# EAGLE board stepper_power (EAGLE 7.2.0)
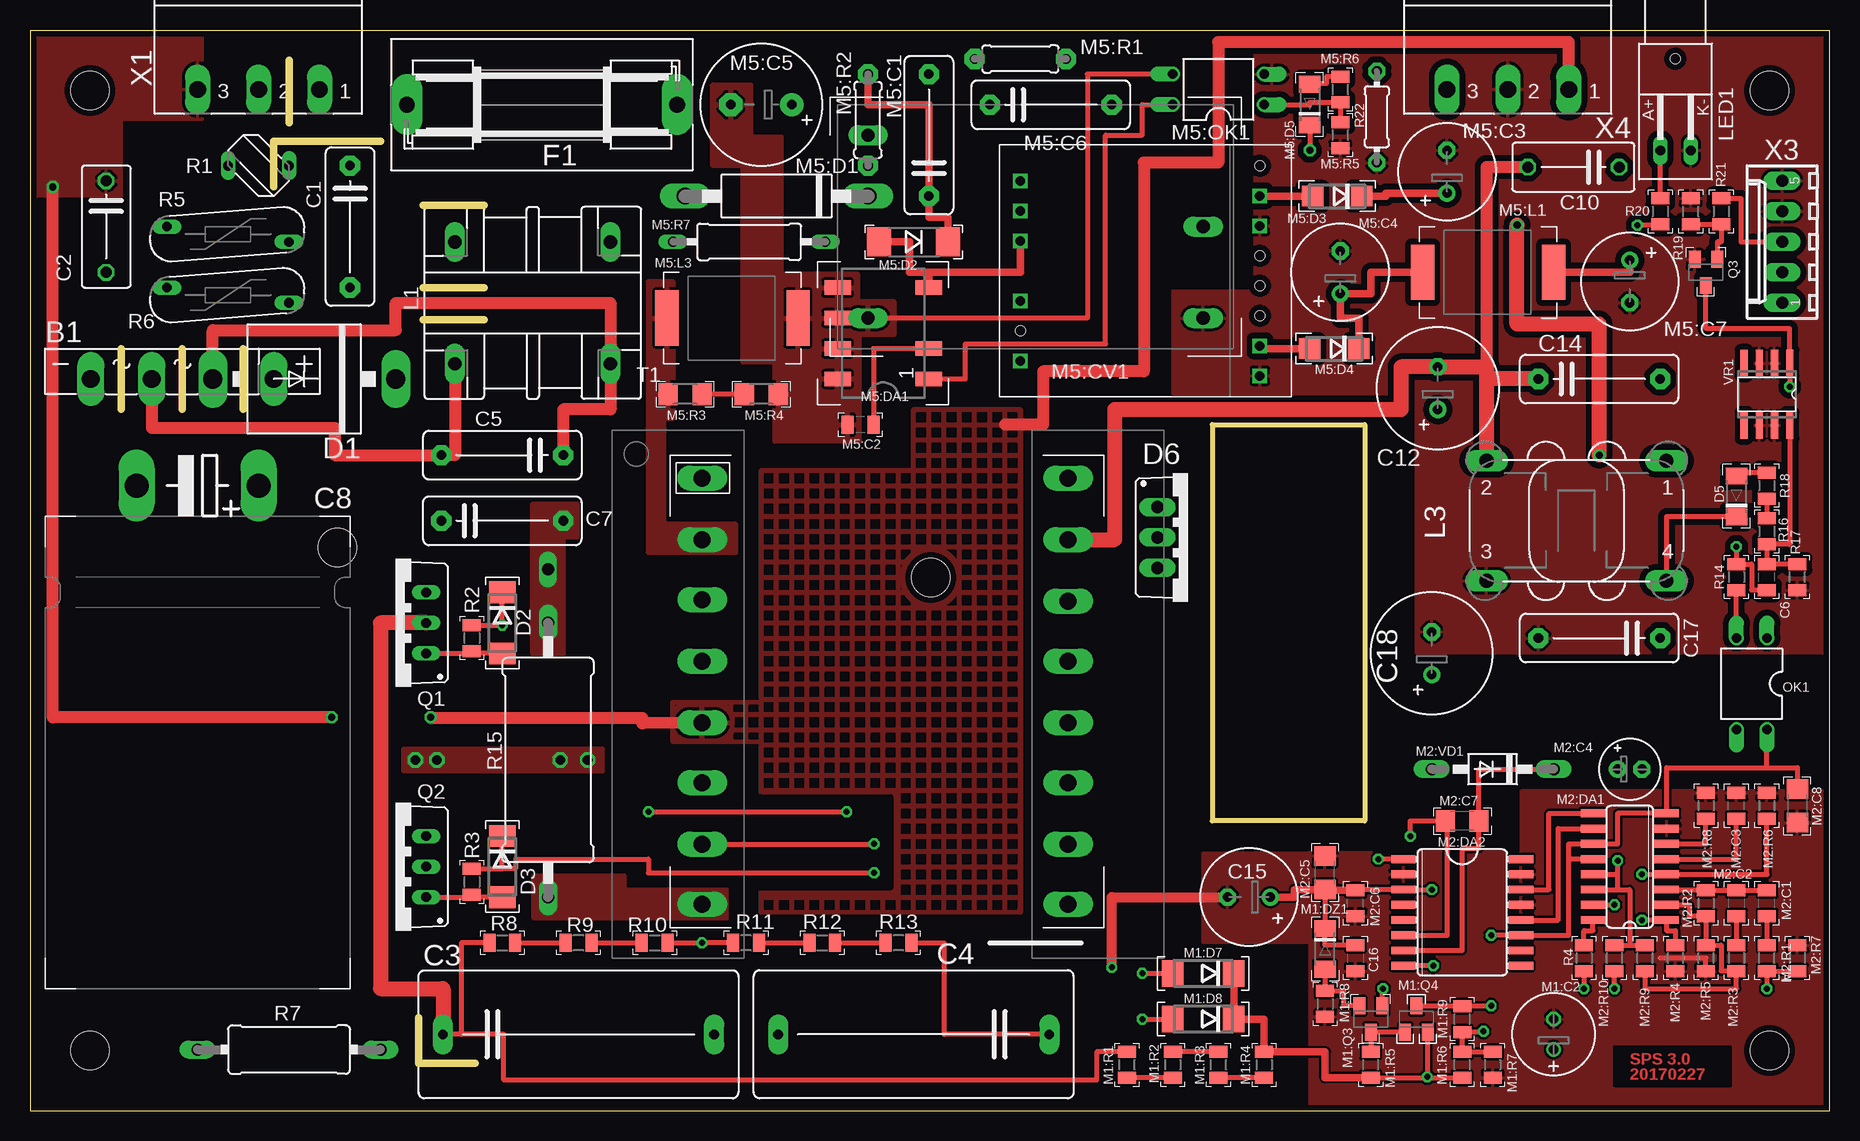
[diagram p0: board, top side]
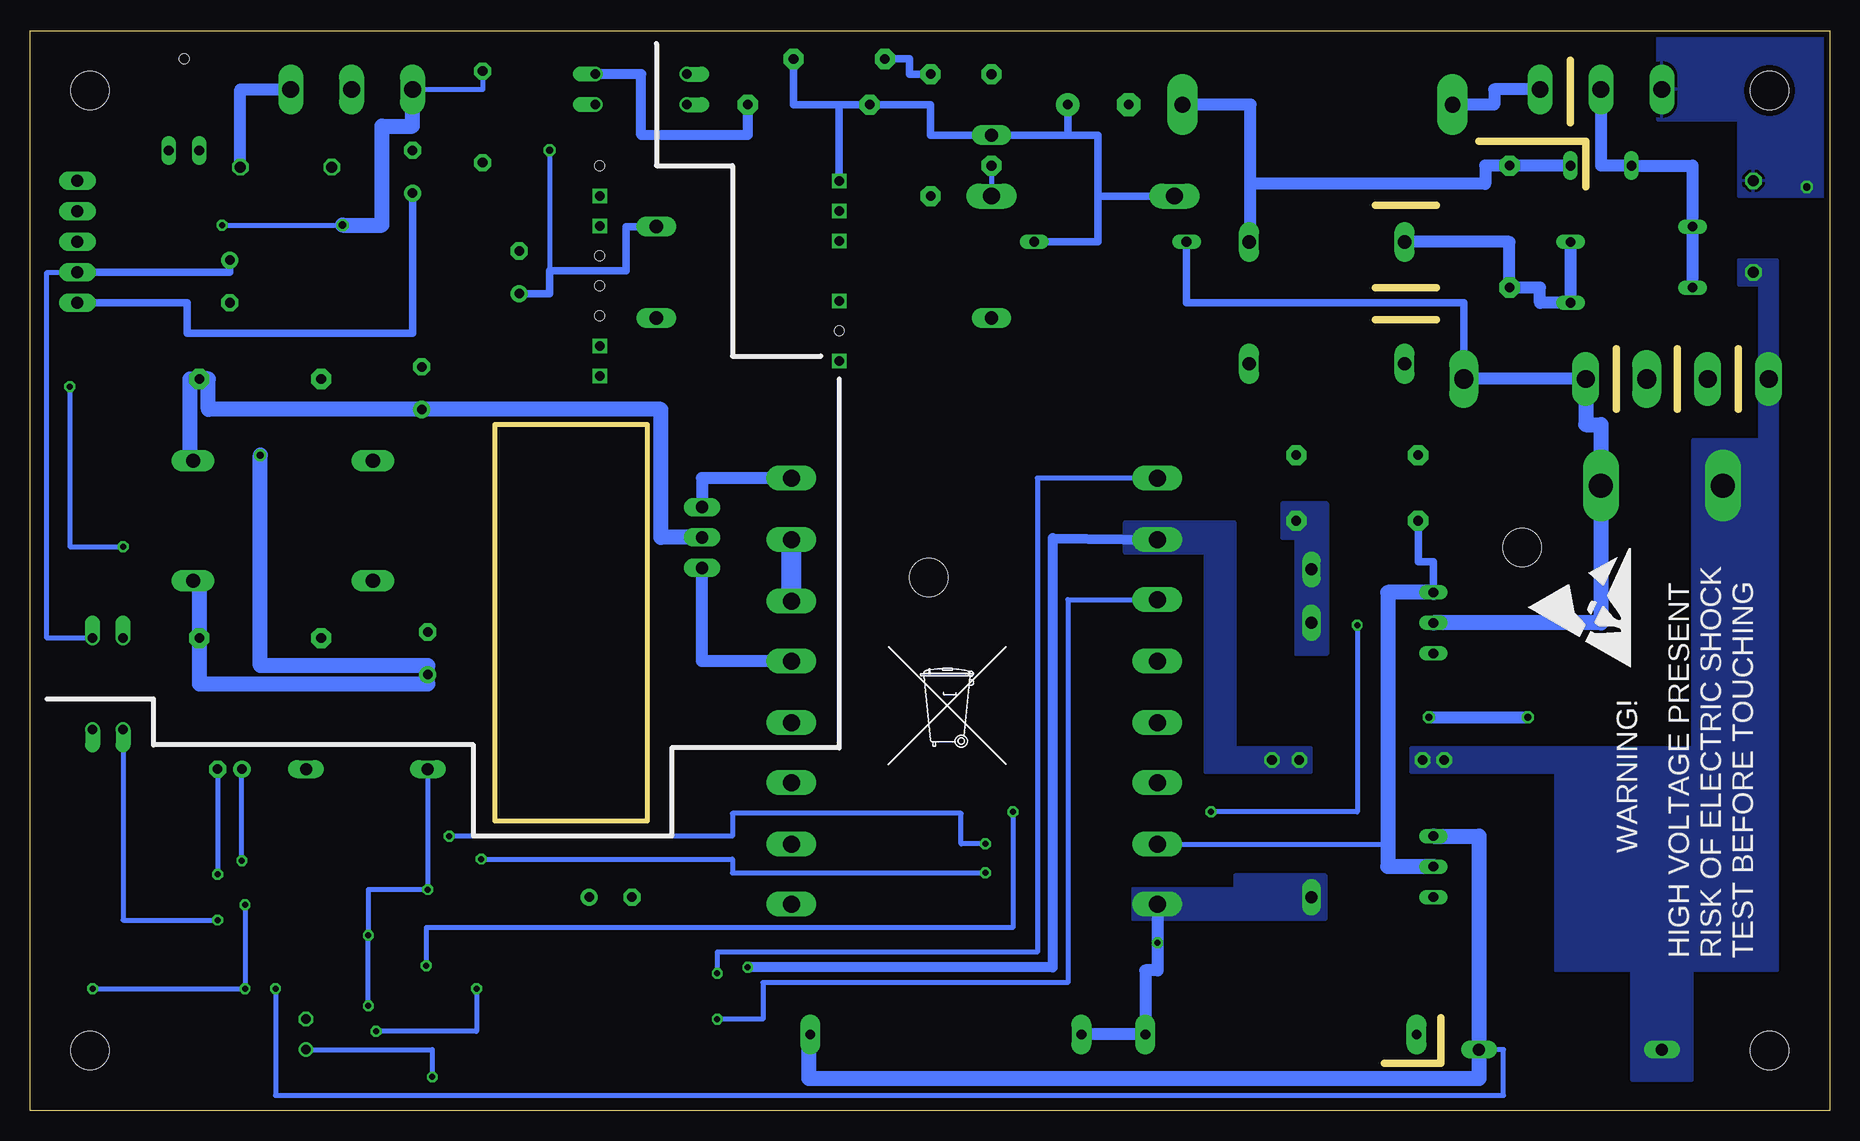
[diagram p1: board, bottom side, seen from below]

Size 150 x 90 mm. Coordinates in mm from the lower left corner, seen from the top.
Outline: 0,0 150,0 150,90 0,90 0,0
Copper layers (1*16): Top 0.035mm / dielectric 1.5mm / Bottom 0.035mm
Design rules "default *": minimum track width 10mil, minimum drill 0.5mm, track to track 8mil, track to pad 8mil, pad to pad 8mil, via to via 8mil, smd to smd 8mil, copper to edge 20mil, drill to drill 8mil, minimum pad ring 0.1mm, minimum via ring 8mil, stop-mask expansion 0.1mm, vias tented up to drill 0.5mm, thermal gap 10mil
Net classes: 0 default: clearance 0.205 mm; 1 power: clearance 0.305 mm to class 0, clearance 0.305 mm; 2 power++: clearance 0.5 mm
Holes 3.2 mm at 5,5 5,85 145,85 145,5 25.62,46.91 75.08,44.42
tRestrict: 7 lines
Milling: 15 lines

## Footprints (pad centres in the part's own frame; a part is rotated, then mirrored left to right if it is on the bottom)
GBU4S = drill 1.499 long: + 7.62,0; - -7.62,0; AC1 2.54,0; AC2 -2.54,0
C102-043X133 = drill 0.8 pad 1.676 octagon: 1 -5.08,0; 2 5.08,0
C075-042X103 = drill 0.914 octagon: 1 -3.81,0; 2 3.81,0
C225-108X268 = drill 0.8 pad 1.676 long: 1 -11.303,0; 2 11.303,0
C0805 = smd 1 x 1.5: 1 -1.077,0; 2 1.077,0
EB25H = drill 2 long: + -5.08,0; - 5.08,0
E3,5-10 = drill 0.8 pad 1.422: + -1.778,0 | drill 0.8 pad 1.422 octagon: - 1.778,0
E3,5-8 = drill 0.8 pad 1.422: + -1.778,0 | drill 0.8 pad 1.422 octagon: - 1.778,0
P6-15-1 = drill 1.6 long: A 7.62,0; C -7.62,0
DO214AA = smd 1.8 x 2.2: A 2.55,0; C -2.55,0
SOD80C = smd 1.4 x 1.8: A 1.7,0; C -1.7,0
TO220ABS = drill 1.016 long: 1 -2.54,-2.54; 2 0,-2.54; 3 2.54,-2.54
SH22,5A = drill 1.321 pad 2.54 long: 1 -11.252,0; 2 11.252,0
MFE = drill 1.118 long: 1 6.477,-5.08; 2 6.477,5.08; 3 -6.477,5.08; 4 -6.477,-5.08
82721K = drill 1.194 long: 1 7.493,5.004; 2 -7.493,5.004; 3 -7.493,-5.004; 4 7.493,-5.004
Q62902-B155 = drill 0.813 long: A 7.62,-1.27; K 7.62,1.27 | hole 0.813: 0,0
E2,5-7 = drill 0.8: + -1.27,0 | drill 0.8 octagon: - 1.27,0
SOT23-BEC = smd 1 x 1.4: B -0.95,-1.1; C 0,1.1; E 0.95,-1.1
R0805 = smd 1 x 1.5: 1 -1.077,0; 2 1.077,0
E2-5 = drill 0.8 pad 1.422: + -1.016,0 | drill 0.8 pad 1.422 octagon: - 1.016,0
C1206 = smd 1.6 x 1.8: 1 -1.4,0; 2 1.4,0
SO16 = smd 0.66 x 2.032: 1 -4.445,-3.073; 2 -3.175,-3.073; 3 -1.905,-3.073; 4 -0.635,-3.073; 5 0.635,-3.073; 6 1.905,-3.073; 7 3.175,-3.073; 8 4.445,-3.073; 9 4.445,3.073; 10 3.175,3.073; 11 1.905,3.073; 12 0.635,3.073; 13 -0.635,3.073; 14 -1.905,3.073; 15 -3.175,3.073; 16 -4.445,3.073
SO16L = smd 0.66 x 2.032: 1 -4.445,-4.902; 2 -3.175,-4.902; 3 -1.905,-4.902; 4 -0.635,-4.902; 5 0.635,-4.902; 6 1.905,-4.902; 7 3.175,-4.902; 8 4.445,-4.902; 9 4.445,4.902; 10 3.175,4.902; 11 1.905,4.902; 12 0.635,4.902; 13 -0.635,4.902; 14 -1.905,4.902; 15 -3.175,4.902; 16 -4.445,4.902
DO41-10 = drill 1 long: A 5.08,0; C -5.08,0
E5-10,5 = drill 0.8 pad 1.93: + -2.54,0 | drill 0.8 pad 1.93 octagon: - 2.54,0
VSK-S1 = drill 1.1 long: AC1 0,15.24; AC2 0,0; COM 27.94,0; VDC 27.94,7.62
CB417-15 = drill 1.397 long: A 7.62,0; C -7.62,0
MELF-MLL41 = smd 2 x 2.4: A 2.879,0; C -2.879,0
DO214AC = smd 1.8 x 1.7: A 2.05,0; C -2.05,0
DIP8_1 = smd 1.2 x 2.2: 1 -3.81,-3.8; 2 -1.27,-3.8; 4 3.81,-3.8; 5 3.81,3.8; 6 1.27,3.8; 7 -1.27,3.8; 8 -3.81,3.8
PLOKSCIAS = smd 1.93 x 4.6: 1 -5.334,0; 2 5.588,0
DIL04 = drill 0.8 pad 1.27 offset: 1 -1.27,-3.81; 2 1.27,-3.81; 3 1.27,3.81; 4 -1.27,3.81
0207/7 = drill 0.813 pad 1.676 octagon: 1 -3.81,0; 2 3.81,0
R1206 = smd 1.6 x 1.803: 1 -1.422,0; 2 1.422,0
0309/12 = drill 0.813 long: 1 -6.35,0; 2 6.35,0
750841630 = drill 0.8 square: 1 0,0; 2 0,-2.5; 3 0,-5; 4 0,-10; 6 0,-15; 7 19.96,-16.25; 8 19.96,-13.75; 12 19.96,-3.75; 13 19.96,-1.25 | hole 0.8: 19.96,-11.25; 19.96,-8.75; 19.96,-6.25; 19.96,1.25; 0,-12.5
LP_D1.0 = drill 1 long: P$1 0,0
TO220BV = drill 0.8 long: D 0,-2.54; G -2.54,-2.54; S 2.54,-2.54
B57164 = drill 0.813 long: 1 -2.54,0; 2 2.54,0
TABLETE_10 = drill 0.8 long: 1 -5.08,0; 2 5.08,-1.27
0411/15 = drill 1 long: 1 -7.62,0; 2 7.62,0
P0817/22 = drill 1.016 long: 1 -11.43,0; 2 11.43,0
0204/7 = drill 0.8 pad 1.422 octagon: 1 -3.81,0; 2 3.81,0
ETD-39-K-H-16P = drill 1.4 pad 1.93 long: 1 6.5,40; 2 6.5,34.873; 3 6.5,29.873; 4 6.5,24.746; 5 6.5,19.619; 6 6.5,14.619; 7 6.5,9.492; 8 6.5,4.492; 9 37,4.492; 10 37,9.492; 11 37,14.619; 12 37,19.619; 13 37,24.746; 14 37,29.746; 15 37,34.873; 16 37,40
SO-08 = smd 0.6 x 2.2: 1 -1.905,-2.6; 2 -0.635,-2.6; 3 0.635,-2.6; 4 1.905,-2.6; 5 1.905,2.6; 6 0.635,2.6; 7 -0.635,2.6; 8 -1.905,2.6
MSTBA3 = drill 1.4 long: 1 -5.08,5.08; 2 0,5.08; 3 5.08,5.08
6410-05 = drill 1.016 long: 1 -5.08,0; 2 -2.54,0; 3 0,0; 4 2.54,0; 5 5.08,0

## Placement (x,y rotation side)
B1  GBU8K  [GBU4S]  12.7,60.96 0 top
C1  10n/400V  [C102-043X133]  26.67,73.66 270 top
C2  10n/400V  [C075-042X103]  6.35,73.66 270 top
C3  1,0uFx400V  [C225-108X268]  45.72,6.35 0 top
C4  1,0uFx400V  [C225-108X268]  73.66,6.35 180 top
C5  10n/400V  [C102-043X133]  39.37,54.61 180 top
C6  0.1  [C0805]  144.78,44.45 90 top
C7  1n  [C102-043X133]  39.37,49.15 0 top
C8  330,0x450V  [EB25H]  13.97,52.07 180 top
C10  10n  [C075-042X103]  128.65,78.61 180 top
C12  470x50V  [E3,5-10]  117.35,60.2 90 top
C14  0.1  [C102-043X133]  130.81,60.96 0 top
C15  220,0x35V  [E3,5-8]  101.6,17.78 180 top
C16  0.1  [C0805]  110.49,12.7 270 top
C17  0.1  [C102-043X133]  130.81,39.37 180 top
C18  470x50V  [E3,5-10]  116.84,38.1 90 top
D1  P600K  [P6-15-1]  22.86,60.96 180 top
D2  UF4007  [DO214AA]  39.37,40.64 270 top
D3  UF4007  [DO214AA]  39.37,20.32 270 top
D5  *  [SOD80C]  142.24,51.18 90 top
D6  MUR1620CTG  [TO220ABS]  96.52,47.75 270 top
F1  5A  [SH22,5A]  42.67,83.82 0 top
L1  MFE  [MFE]  41.91,67.31 0 top
L3  82721K  [82721K]  128.91,49.15 0 top
LED1  POWER  [Q62902-B155]  137.16,87.63 270 top
M1:C2  47,0x50V  [E2,5-7]  127,6.35 90 top
M1:D7  STTH108  [DO214AA]  97.79,11.43 180 top
M1:D8  STTH108  [DO214AA]  97.79,7.62 180 top
M1:DZ1  16V  [SOD80C]  107.95,13.46 270 top
M1:Q3  BC817-16SMD  [SOT23-BEC]  111.76,7.62 180 top
M1:Q4  BC807-16SMD  [SOT23-BEC]  115.57,7.62 0 top
M1:R1  47k  [R0805]  91.44,3.81 90 top
M1:R2  47k  [R0805]  95.25,3.81 270 top
M1:R3  47k  [R0805]  99.06,3.81 90 top
M1:R4  47k  [R0805]  102.87,3.81 270 top
M1:R5  100k  [R0805]  111.76,3.81 90 top
M1:R6  470k  [R0805]  119.38,3.81 90 top
M1:R7  7.5k  [R0805]  121.92,3.81 270 top
M1:R8  1k  [R0805]  107.95,8.89 270 top
M1:R9  100k  [R0805]  119.38,7.62 90 top
M2:C1  10n  [C0805]  144.78,17.27 90 top
M2:C2  10n  [C0805]  142.24,17.27 270 top
M2:C3  4700  [C0805]  142.24,25.4 90 top
M2:C4  10x25V  [E2-5]  133.35,28.45 0 top
M2:C5  1uF  [C1206]  107.95,19.81 90 top
M2:C6  0.1  [C0805]  110.49,17.27 90 top
M2:C7  1uF  [C1206]  119.38,24.13 180 top
M2:C8  1uF  [C1206]  147.32,25.4 270 top
M2:DA1  TL494CD  [SO16]  133.35,20.32 90 top
M2:DA2  IR2113S  [SO16L]  119.38,16.51 270 top
M2:R1  33k  [R0805]  144.78,12.7 90 top
M2:R2  1M  [R0805]  139.7,17.27 270 top
M2:R3  33k  [R0805]  142.24,12.7 270 top
M2:R4  20k  [R0805]  137.16,12.7 90 top
M2:R5  20k  [R0805]  139.7,12.7 90 top
M2:R6  10k  [R0805]  144.78,25.4 270 top
M2:R7  1k*  [R0805]  147.32,12.7 270 top
M2:R8  4.1k  [R0805]  139.7,25.4 270 top
M2:R9  20k  [R0805]  134.62,12.7 90 top
M2:R10  20k  [R0805]  132.08,12.7 90 top
M2:VD1  UF4007  [DO41-10]  121.92,28.45 180 top
M5:C1  0.01x630V  [C102-043X133]  74.93,81.28 90 top
M5:C2  0.1  [C0805]  69.22,57.15 180 top
M5:C3  100x50V  [E3,5-8]  118.11,78.23 90 top
M5:C4  100x16V  [E3,5-8]  109.22,69.85 90 top
M5:C5  10.0x400V  [E5-10,5]  60.96,83.82 180 top
M5:C6  2.2nx250V  [C102-043X133]  85.09,83.82 0 top
M5:C7  100x16V  [E3,5-8]  133.35,69.09 270 top
M5:CV1  VSK-S1-5V  [VSK-S1]  69.85,66.04 0 top
M5:D1  P6KE150  [CB417-15]  62.23,76.2 180 top
M5:D2  LL4007  [MELF-MLL41]  73.66,72.39 180 top
M5:D3  10MQ100  [DO214AC]  108.97,76.2 180 top
M5:D4  10MQ100  [DO214AC]  108.71,63.5 180 top
M5:D5  12V  [SOD80C]  106.68,83.82 90 top
M5:DA1  [DIP8_1]  71.12,64.77 90 top
M5:L1  [PLOKSCIAS]  121.41,69.85 0 top
M5:L3  [PLOKSCIAS]  58.42,66.04 0 top
M5:OK1  PC817  [DIL04]  99.06,85.09 90 top
M5:R1  100  [0207/7]  82.55,87.63 0 top
M5:R2  1k  [0207/7]  69.85,82.55 270 top
M5:R3  1k  [R1206]  54.61,59.69 0 top
M5:R4  1k  [R1206]  60.96,59.69 0 top
M5:R5  1k  [R0805]  109.22,81.28 90 top
M5:R6  470  [R0805]  109.22,85.09 90 top
M5:R7  47  [0309/12]  59.94,72.39 0 top
M5:T2  [750841630]  82.55,77.47 0 top
OK1  PC817  [DIL04]  143.51,35.56 180 top
P1  [LP_D1.0]  43.18,45.09 90 top
Q1  IRF740V  [TO220BV]  30.48,40.64 90 top
Q2  IRF740V  [TO220BV]  30.48,20.32 90 top
Q3  BC817  [SOT23-BEC]  139.7,69.85 180 top
R1  275V  [B57164]  19.05,78.74 180 top
R2  30  [R0805]  36.83,39.37 270 top
R3  30  [R0805]  36.83,19.05 270 top
R4  1k  [R0805]  129.54,12.7 270 top
R5  33  [TABLETE_10]  16.51,72.39 180 top
R6  33  [TABLETE_10]  16.51,67.31 180 top
R7  0.1  [0411/15]  21.59,5.08 0 top
R8  33k  [R0805]  39.37,13.97 0 top
R9  33k  [R0805]  45.72,13.97 180 top
R10  33k  [R0805]  52.07,13.97 0 top
R11  33k  [R0805]  59.69,13.97 180 top
R12  33k  [R0805]  66.04,13.97 0 top
R13  33k  [R0805]  72.39,13.97 180 top
R14  1.2k  [R0805]  142.24,44.45 270 top
R15  100  [P0817/22]  43.18,29.21 90 top
R16  10k  [R0805]  144.78,48.26 270 top
R17  10k  [R0805]  147.32,44.45 90 top
R18  82k  [R0805]  144.78,52.07 270 top
R19  10k  [R0805]  138.43,74.93 90 top
R20  [R0805]  135.89,74.93 270 top
R21  1k  [R0805]  140.97,74.93 270 top
R22  10k  [0204/7]  112.27,82.8 270 top
T1  [ETD-39-K-H-16P]  49.53,12.7 0 top
U$2  [TONNE_10.00]  73.66,31.75 0 bottom
U$3  [ESD_10.00]  16.51,36.83 90 bottom
VR1  TL431  [SO-08]  144.78,59.69 180 top
X1  MAIN  [MSTBA3]  19.05,90.17 180 top
X3  Stepper Control  [6410-05]  146.05,72.39 90 top
X4  MSTBA3  [MSTBA3]  123.19,90.17 180 top

## Library data of the parts
B1 = rectifier
C1-C8 C10 C12 C14-C18 M1:C2 M1:R1-M1:R9 M2:C1-M2:C8 M2:R1-M2:R10 M5:C1-M5:C7 M5:R1-M5:R7 R2-R4 R7-R22 = rcl
D1-D3 D5 D6 M1:D7 M1:D8 M1:DZ1 M2:VD1 M5:D1-M5:D5 = diode
F1 = fuse
L1 L3 M5:L1 M5:L3 = inductors
LED1 = led
M1:Q3 Q3 = transistor-npn
M1:Q4 = transistor-pnp
M2:DA1 M5:DA1 = linear
M2:DA2 = ir
M5:CV1 = descreet
M5:OK1 OK1 = optocoupler
M5:T2 T1 = trafo
P1 = misc
Q1 Q2 = transistor-power
R1 R5 R6 = ptc-ntc
U$2 U$3 = logo
VR1 = v-reg
X1 X4 = con-phoenix-508
X3 = connectors

## Nets
5VDC: M5:C7.+ M5:L1.2 OK1.1 X3.2
12VDC: M5:C3.+ M5:D3.C X3.1
+V [power++]: B1.+ C3.1 C8.+ D1.C M1:R1.2 M5:R7.1 Q1.D R8.1
AGND: B1.- C2.2 C8.- C15.- C16.2 M1:C2.- M1:R7.2 M1:R8.2 M2:C3.2 M2:C5.2 M2:C6.1 M2:C8.2 M2:DA1.7 M2:DA2.2 M2:DA2.13 M2:DA2.15 M2:R4.1 M2:R5.1 M2:R6.1 M2:R7.1 M2:R8.1 M5:L3.1 M5:R3.1 R7.1 T1.2
COM [power++]: C17.2 C18.- L3.3 LED1.K M5:C3.- M5:C4.- M5:C6.2 M5:C7.- M5:CV1.COM M5:OK1.2 M5:R5.1 M5:T2.7 M5:T2.12 Q3.E R17.1 R19.2 R22.2 VR1.2 VR1.3 VR1.6 VR1.7 X3.4 X3.5 X4.2
FB: M2:DA1.16 R4.1
HO [power++]: D2.C M2:DA2.8 R2.1
LO [power]: D3.C M2:DA2.1 R3.1
M1:N$1 [power]: M1:C2.+ M1:D7.C M1:D8.C M1:Q4.E M1:R4.1 M1:R5.1 M1:R6.1
M1:N$2: M1:Q3.B M1:R6.2 M1:R7.1 M1:R9.1
M1:N$3: M1:DZ1.A M1:Q3.E M1:R8.1
M1:N$4: M1:Q3.C M1:Q4.B M1:R5.2
M1:N$5: M1:R3.1 M1:R4.2
M1:N$8: M1:R1.1 M1:R2.2
M1:N$9: M1:R2.1 M1:R3.2
M2:N$1: M2:DA1.9 M2:DA2.14
M2:N$2: M2:DA1.10 M2:DA2.12
M2:N$3 [power++]: M2:C7.1 M2:DA2.7 M2:VD1.C
M2:N$4: M2:DA1.6 M2:R8.2
M2:N$5: M2:C3.1 M2:DA1.5
M2:N$6: M2:C1.1 M2:R1.2
M2:N$7: M2:C1.2 M2:C2.1 M2:DA1.3 M2:R2.1
M2:N$8: M2:DA1.2 M2:R2.2 M2:R3.2 M2:R5.2 M2:R9.1
M2:N$9: M2:C4.+ M2:DA1.13 M2:DA1.14 M2:R9.2 M2:R10.2
M2:N$10: M2:C2.2 M2:R3.1
M2:N$11: M2:DA1.15 M2:R1.1 M2:R7.2 M2:R10.1
M2:N$12: M2:C4.- M2:DA1.4 M2:R6.2
M5:AGND: M5:C2.2 M5:C5.- M5:CV1.AC2 M5:DA1.5 M5:DA1.6 M5:DA1.7 M5:DA1.8 M5:L3.2 M5:OK1.3 M5:R4.2
M5:N$1: M5:C1.2 M5:R1.1
M5:N$2: M5:D1.C M5:R2.2
M5:N$3: M5:C5.+ M5:C6.1 M5:CV1.AC1 M5:D1.A M5:R1.2 M5:R7.2 M5:T2.1
M5:N$4: M5:C1.1 M5:D2.C M5:R2.1
M5:N$5: M5:C2.1 M5:DA1.2
M5:N$6: M5:D2.A M5:DA1.4 M5:T2.3
M5:N$7: M5:C4.+ M5:CV1.VDC M5:D4.C M5:D5.C M5:L1.1
M5:N$8: M5:DA1.1 M5:OK1.4
M5:N$9: M5:D3.A M5:T2.13
M5:N$10: M5:D4.A M5:T2.8
M5:N$13: M5:OK1.1 M5:R5.2 M5:R6.1
M5:N$15: M5:R3.2 M5:R4.1
M5:N$16: M5:D5.A M5:R6.2
N$1: OK1.2 R14.2
N$2: R11.1 R12.1
N$4 [power++]: C3.2 C4.2 R10.2 R11.2 R15.1 T1.8
N$5: C7.2 P1.P$1 R15.2
N$6: D3.A Q2.G R3.2
N$7: D6.1 T1.16
N$8: D6.3 T1.13
N$9: C6.2 R16.2 R17.2 VR1.8
N$10 [power++]: D5.A R18.1
N$12: C10.2 C12.- C14.1 L3.2 T1.14 T1.15
N$13: Q3.B R19.1 R21.2
N$14 [power++]: C12.+ C14.2 D6.2 L3.1
N$16: D2.A Q1.G R2.2
N$19: R12.2 R13.2
N$26: R9.1 R10.1
N$27: R8.2 R9.2
N$28: LED1.A R20.1
N$29 [power++]: C1.2 L1.3 R5.1 R6.1
N$30 [power++]: C1.1 F1.2 L1.2 R1.1
N$31 [power++]: R1.2 R5.2 R6.2 X1.2
N$32 [power++]: F1.1 X1.1
N$33: C6.1 Q3.C R14.1 VR1.1
N$34: B1.AC2 C5.2 L1.4
N$36: R16.1 R18.2
N$37 [power]: C4.1 Q2.S R4.2 R7.2 R13.1
N$43 [power++]: B1.AC1 C5.1 D1.A L1.1
OKE [power]: M2:DA1.1 M2:R4.2 OK1.3
PE [power++]: C2.1 C10.1 T1.5 X1.3 X4.1
PSTOP: R21.1 X3.3
TRA [power]: M1:D8.A T1.3
TRB [power]: M1:D7.A T1.1
VB [power++]: C7.1 M2:C7.2 M2:DA2.6 Q1.S Q2.D T1.7
VC [power]: C15.+ C16.1 M1:DZ1.C M1:Q4.C M1:R9.2 M2:C5.1 M2:C6.2 M2:C8.1 M2:DA1.8 M2:DA1.11 M2:DA1.12 M2:DA2.3 M2:DA2.11 M2:VD1.A OK1.4
VOUT [power++]: C17.1 C18.+ D5.C L3.4 R20.2 R22.1 X4.3

## Tracks (layer width: path | path; a pad name or v marks a point on that pad's centre or on a via)
5VDC
  Top 0.61: M5:L1.2 133.35,69.85 M5:C7.+
  Bottom 0.406: OK1.1 148.59,39.37 148.59,69.85 X3.2
  Bottom 0.61: X3.2 133.35,69.85 M5:C7.+
12VDC
  Top 0.61: M5:D3.C 113.03,76.2 113.03,76.45 M5:C3.+
  Bottom 0.61: M5:C3.+ 118.11,64.77 136.91,64.77 136.91,67.31 X3.1
+V
  Top 0.406: R8.1 35.94,13.97 35.94,6.35 | 35.94,6.35 C3.1 | M1:R1.2 88.9,4.89 88.9,2.54 39.5,2.54 39.5,6.35 35.94,6.35
  Top 1.27: Q1.D 29.21,40.64 29.21,10.16 34.42,10.16 C3.1
  Bottom 0.61: D1.C 30.48,67.31 53.59,67.31 M5:R7.1
  Bottom 1.016: B1.+ D1.C
  Bottom 1.27: B1.+ 20.32,57.15 19.05,57.15 C8.+ 19.05,40.64 Q1.D
AGND  (via drill 0.5, 0.8 pad 1.27)
  Top 0.406: M2:R5.1 139.7,12.7 135.89,12.7
  Top 0.813: v90.17,11.94 90.17,17.78 C15.-
  Bottom 0.813: v90.17,11.94 64.77,11.94 64.77,47.7 T1.2
  other vias: 33.91,29.21 44.2,29.21 32.13,29.21 46.48,29.21
  pour Bottom (no thermals): 4.32,70.87 7.62,70.87 7.62,68.83 5.84,68.83 5.84,55.88 11.43,55.88 11.43,30.23 34.92,30.23 34.92,28.19 22.86,28.19 22.86,11.68 16.51,11.68 16.51,2.54 11.43,2.54 11.43,11.68 4.32,11.68
  pour Top: 97.79,21.46 124.33,21.59 124.33,26.67 149.86,26.67 149.86,0 106.68,0 106.68,13.97 97.79,13.97
  pour Bottom (no thermals): 43.18,30.23 49.53,30.23 49.53,49.02 58.8,49.02 58.8,46.48 52.07,46.48 52.07,28.19 43.18,28.19
  pour Top: 31.11,30.23 47.75,30.23 47.75,28.19 31.11,28.19
  pour Top: 51.56,69.09 53.59,69.09 53.59,57.66 52.83,57.66 52.83,48.9 51.56,48.9
  pour Top (no thermals): 51.56,48.9 58.8,48.9 58.8,46.48 51.56,46.48
COM
  Bottom 0.813: M5:C6.2 90.17,81.28 99.06,81.28 99.06,86.36 M5:OK1.2
  pour Top: 149.86,38.1 115.57,38.1 115.57,59.69 95.25,59.69 95.25,68.33 102.11,68.33 102.11,90.17 149.86,90.17
FB
  Top 0.406: R4.1 129.54,14.99 130.28,14.99 M2:DA1.16
HO  (via drill 0.5)
  Top 0.406: R2.1 v39.37,40.45 D2.C | v116.97,12.06 M2:DA2.8 | v51.56,24.89 v68.07,24.89
  Bottom 0.406: v39.37,40.45 39.37,24.89 v51.56,24.89 | v116.97,12.06 116.97,15.24 68.07,15.24 v68.07,24.89
LO  (via drill 0.5)
  Top 0.406: R3.1 39.37,20.13 39.37,20.19 | 39.37,20.19 D3.C | 39.37,20.19 40.51,20.19 40.51,20.95 51.56,20.95 51.56,19.81 v70.36,19.81 | M2:DA2.1 v112.39,20.95
  Bottom 0.406: v112.39,20.95 91.44,20.95 91.44,19.81 v70.36,19.81
M1:N$1  (via drill 0.5)
  Top 0.406: M1:R5.1 116.46,2.73 | 116.46,2.73 M1:R6.1 | M1:Q4.E 116.46,6.52 v116.46,2.79 116.46,2.73
  Top 0.61: M1:D7.C M1:D8.C 102.87,7.62 M1:R4.1 107.95,4.89 107.95,2.73 M1:R5.1
  Bottom 0.406: M1:C2.+ 116.46,5.08 v116.46,2.79 116.46,2.73
M1:N$2  (via drill 0.5)
  Top 0.406: M1:R7.1 M1:R6.2 M1:R9.1 121.16,6.54 v121.16,6.6 | M1:Q3.B 112.71,10.16 v112.78,10.16
  Bottom 0.406: v112.78,10.16 112.78,6.6 v121.16,6.6
M1:N$3
  Top 0.406: M1:DZ1.A M1:R8.1 109.47,9.97 109.47,8.72 M1:Q3.E
M1:N$4
  Top 0.406: M1:Q4.B M1:Q3.C M1:R5.2
M1:N$5
  Top 0.406: M1:R4.2 M1:R3.1
M1:N$8
  Top 0.406: M1:R2.2 M1:R1.1
M1:N$9
  Top 0.406: M1:R3.2 M1:R2.1
M2:N$1
  Top 0.406: M2:DA2.14 126.62,18.41 126.62,24.77 M2:DA1.9
M2:N$2
  Top 0.406: M2:DA2.12 127.38,15.88 127.38,23.5 M2:DA1.10
M2:N$3
  Top 0.406: M2:DA2.7 119.38,13.34 119.38,21.84 120.78,21.84 M2:C7.1 120.78,28.45 M2:VD1.C
M2:N$4
  Top 0.406: M2:DA1.6 139.7,22.23 M2:R8.2
M2:N$5
  Top 0.406: M2:DA1.5 142.24,20.95 M2:C3.1
M2:N$6
  Top 0.406: M2:C1.1 M2:R1.2
M2:N$7
  Top 0.406: M2:C1.2 M2:C2.1 M2:R2.1 139.7,18.41 M2:DA1.3
M2:N$8
  Top 0.406: M2:DA1.2 138.3,17.14 138.3,16.2 M2:R2.2 M2:R5.2 140.97,13.78 140.97,11.62 M2:R3.2 142.24,10.16 134.62,10.16 M2:R9.1
M2:N$9  (via drill 0.5)
  Top 0.406: M2:DA1.13 132.33,19.68 | M2:DA1.14 132.33,18.41 | 132.33,18.41 132.33,19.68 | M2:R10.2 133.35,13.78 | 133.35,13.78 M2:R9.2 | 132.33,19.68 v132.33,20.83 | 132.33,18.41 133.35,18.41 133.35,13.78
  Bottom 0.406: v132.33,20.83 M2:C4.+
M2:N$10
  Top 0.406: M2:C2.2 M2:R3.1
M2:N$11  (via drill 0.5)
  Top 0.406: M2:R7.2 M2:R1.1 v144.78,10.16 | v132.08,10.16 M2:R10.1 | M2:DA1.15 v132.08,17.14
  Bottom 0.406: v132.08,17.14 v132.08,10.16 v144.78,10.16
M2:N$12  (via drill 0.5)
  Top 0.406: M2:R6.2 144.78,19.68 M2:DA1.4 v134.37,19.68
  Bottom 0.406: M2:C4.- v134.37,19.68
M5:AGND
  Top 0.406: M5:OK1.3 88.14,86.36 88.14,66.04 M5:CV1.AC2
  Top 0.61: M5:CV1.AC2 M5:DA1.6
  pour Top: 69.09,55.75 62.1,55.75 62.1,62.36 59.44,62.36 59.44,78.74 56.9,78.74 56.9,85.47 60.07,85.47 60.07,81.15 62.61,81.15 62.61,69.72 68.96,69.72 68.96,67.44 72.01,67.44 72.01,64.64 69.09,64.64
M5:N$1
  Bottom 0.61: M5:C1.2 76.71,86.36 76.71,87.63 M5:R1.1
M5:N$2
  Bottom 0.406: M5:R2.2 M5:D1.C
M5:N$3
  Bottom 0.61: 82.55,83.82 M5:C6.1 74.93,83.82 74.93,81.28 M5:CV1.AC1 63.5,81.28 | 82.55,83.82 86.36,83.82 M5:R1.2 | M5:R7.2 60.96,72.39 60.96,76.2 | 60.96,76.2 M5:D1.A | M5:C5.+ 63.5,81.28 | 60.96,76.2 60.96,81.28 63.5,81.28 | M5:T2.1 82.55,83.82
M5:N$4
  Top 0.61: M5:R2.1 69.85,83.82 74.93,83.82 M5:C1.1 74.93,74.42 76.54,74.42 M5:D2.C
M5:N$5
  Top 0.406: M5:DA1.2 70.29,63.5 M5:C2.1
M5:N$6
  Top 0.61: M5:T2.3 82.55,69.85 74.92,69.85 | 74.92,69.85 73.32,69.85 73.32,72.39 M5:D2.A | M5:DA1.4 74.92,69.85
M5:N$7  (via drill 0.6)
  Top 0.406: M5:D5.C v106.68,80.01
  Top 0.61: M5:D4.C 110.76,66.04 109.22,66.04 M5:C4.+ 111.76,68.07 111.76,69.85 M5:L1.1
  Bottom 0.406: v106.68,80.01 106.68,69.98
  Bottom 0.61: M5:C4.+ 106.68,68.07 106.68,69.98 100.33,69.98 100.33,73.66 M5:CV1.VDC
M5:N$8
  Top 0.406: M5:DA1.1 77.98,60.96 77.98,63.88 89.66,63.88 89.66,81.28 92.71,81.28 92.71,83.82 M5:OK1.4
M5:N$9
  Top 0.406: 102.51,76.2 M5:T2.13
  Top 0.61: M5:D3.A 102.51,76.2
M5:N$10
  Top 0.61: M5:D4.A 102.51,63.5 M5:T2.8
M5:N$13
  Top 0.406: M5:OK1.1 106.68,83.82 106.68,84.01 M5:R6.1 M5:R5.2
M5:N$15
  Top 0.406: M5:R4.1 M5:R3.2
M5:N$16
  Top 0.406: M5:R6.2 108.08,86.17 108.08,85.6 106.68,85.6 M5:D5.A
N$1
  Top 0.406: OK1.2 R14.2
N$2
  Top 0.406: R11.1 R12.1
N$4  (via drill 0.5)
  Top 0.406: R10.2 v56.01,13.97 R11.2
  Bottom 1.016: C4.2 C3.2 57.02,11.68 56.01,11.68 v56.01,13.97 56.01,17.7
  pour Bottom (no thermals): 42.04,19.56 49.53,19.56 49.53,18.41 58.04,18.41 58.04,16 42.04,16
  pour Top (no thermals): 42.04,19.56 49.53,19.56 49.53,18.41 58.04,18.41 58.04,16 42.04,16
N$5
  pour Bottom (no thermals): 41.91,50.55 45.59,50.55 45.59,47.75 44.45,47.75 44.45,38.1 41.91,38.1
  pour Top (no thermals): 41.91,50.55 45.59,50.55 45.59,47.75 44.45,47.75 44.45,38.1 41.91,38.1
N$6
  Top 0.406: Q2.G 36.83,17.78 R3.2 36.83,17.77 D3.A
N$7
  Bottom 1.016: T1.16 93.98,52.7 D6.1
N$8
  Bottom 1.016: T1.13 93.98,37.45 D6.3
N$9
  Top 0.406: R17.2 C6.2 R16.2 146.69,47.18 VR1.8
N$10
  Top 0.406: R18.1 142.24,53.15 D5.A
N$12
  Top 1.016: C10.2 121.41,78.61 121.41,61.98
  Top 1.27: T1.15 90.42,47.57 90.42,58.42 114.3,58.42 114.3,61.98 C12.- 121.41,61.98 121.41,60.96 | 121.41,60.96 L3.2 | C14.1 121.41,60.96
  Bottom 1.676: T1.14 T1.15
N$13
  Top 0.406: R19.1 R21.2 140.97,72.39 140.65,72.39 Q3.B
N$14
  Bottom 1.016: L3.1 136.65,54.28
  Bottom 1.27: D6.2 97.41,47.75 97.41,58.42 C12.+ 135.13,58.42 135.13,60.96 C14.2 136.65,60.96 136.65,54.28
N$16
  Top 0.406: Q1.G 36.83,38.1 R2.2 36.83,38.09 D2.A
N$19
  Top 0.406: R12.2 R13.2
N$26
  Top 0.406: R9.1 R10.1
N$27
  Top 0.406: R8.2 R9.2
N$28
  Top 0.406: R20.1 LED1.A
N$29
  Bottom 1.016: R5.1 R6.1 24.13,67.31 24.13,68.58 C1.2 26.67,72.39 L1.3
N$30
  Bottom 1.016: R1.1 C1.1 28.7,78.74 28.7,77.22 48.26,77.22 | 48.26,77.22 48.26,83.82 F1.2 | L1.2 48.26,72.39 48.26,77.22
N$31
  Bottom 1.016: X1.2 19.05,78.74 R1.2 11.43,78.74 R5.2 R6.2
N$32
  Bottom 1.016: X1.1 27.94,85.09 27.94,83.82 F1.1
N$33  (via drill 0.5)
  Top 0.406: C6.1 143.51,43.37 143.51,45.53 R14.1 v142.24,46.99 | v146.69,60.33 VR1.1 146.69,65.15 139.7,65.15 Q3.C
  Bottom 0.406: v146.69,60.33 146.69,46.99 v142.24,46.99
N$34
  Top 1.016: B1.AC2 10.16,56.9 25.4,56.9 25.4,54.61 C5.2 35.43,54.61 L1.4
N$36
  Top 0.406: R18.2 R16.1
N$37  (via drill 0.5)
  Top 0.406: C4.1 76.2,6.35 76.2,13.97 R13.1 | R4.2 v129.54,10.16
  Bottom 0.406: v129.54,10.16 129.54,1.27 27.18,1.27 27.18,5.08 R7.2
  Bottom 1.016: C4.1 85.09,6.35
  Bottom 1.27: Q2.S 29.21,22.86 R7.2 29.21,2.67 85.09,2.67 85.09,6.35
N$43
  Top 1.016: D1.A 15.24,65.02 30.48,65.02 30.48,67.31 48.39,67.31 L1.1 48.39,58.42 44.45,58.42 C5.1
OKE  (via drill 0.5)
  Top 0.406: M2:R4.2 137.16,14.99 136.4,14.99 136.4,15.88 M2:DA1.1 v134.37,15.88
  Bottom 0.406: OK1.3 142.24,15.88 v134.37,15.88
PE  (via drill 0.6, 0.6 pad 0.5)
  Top 1.016: T1.5 51.05,32.26 51.05,32.7 33.4,32.7 v33.4,32.77 | v25.15,32.77 1.91,32.77 v1.91,76.96 | X4.1 128.27,89.03 99.06,89.03 99.06,78.99 92.84,78.99 92.84,61.59 84.45,61.59 84.45,57.15 81.28,57.15
  Bottom 1.016: C10.1 132.46,85.09 X4.1 | v33.4,32.77 v25.15,32.77
  pour Bottom: 0,90.04 14.35,90.04 14.35,82.55 7.62,82.55 7.62,76.2 0,76.2
  pour Top: 0,90.04 14.35,90.04 14.35,82.55 7.62,82.55 7.62,76.2 0,76.2
  pour Top (hatched): 60.96,53.34 73.66,53.34 73.66,58.42 82.55,58.42 82.55,16.51 60.96,16.51 60.96,30.73 53.59,30.73 53.59,34.04 60.96,34.04
PSTOP
  Top 0.406: R21.1 142.62,76.01 142.62,72.39 X3.3
TRA  (via drill 0.5)
  Top 0.406: v92.71,7.62 M1:D8.A
  Bottom 0.406: v92.71,7.62 88.9,7.62 88.9,10.67 63.5,10.67 63.5,42.57 T1.3
TRB  (via drill 0.5)
  Top 0.406: v92.71,11.43 M1:D7.A
  Bottom 0.406: v92.71,11.43 92.71,13.21 66.04,13.21 66.04,52.7 T1.1
VB  (via drill 0.5)
  Top 0.406: M2:DA2.6 118.11,14.61 118.11,24.13 M2:C7.2 115.06,24.13 v115.06,22.86 | T1.7 70.36,22.19 v70.36,22.23
  Bottom 0.406: v115.06,22.86 91.44,22.86 91.44,24.77 72.39,24.77 72.39,22.23 v70.36,22.23 | T1.7 36.83,22.19
  Bottom 0.61: C7.1 34.29,45.72 33.02,45.72 Q1.S
  Bottom 1.27: Q2.D 36.83,20.32 36.83,22.19 36.83,43.18 Q1.S
VC  (via drill 0.5)
  Top 0.406: v121.79,14.61 M2:DA2.11 128.27,14.61 128.27,20.95 | v116.84,18.41 M2:DA2.3 110.49,18.41 M2:C6.2 | 107.95,18.48 M2:C5.1 107.95,18.35 M1:DZ1.C 107.95,13.78 C16.1 | 144.78,28.57 136.42,28.57 M2:DA1.8 132.33,24.77 132.33,22.23 M2:DA1.11 128.27,22.23 128.27,20.95 | 144.78,28.57 OK1.4 | M2:DA1.12 128.27,20.95 | 144.78,28.57 147.32,28.57 M2:C8.1 | M1:Q4.C 119.38,8.72 | 119.38,8.72 M1:R9.2 | 119.38,8.72 v121.79,8.72
  Top 0.61: C15.+ 105.41,17.78 105.41,18.41 M2:C5.1 | M2:C6.2 107.95,18.35
  Bottom 0.406: M2:VD1.A v116.84,18.41 121.79,18.41 v121.79,14.61 v121.79,8.72
VOUT  (via drill 0.5, 0.6)
  Top 0.406: D5.C 136.4,49.48 L3.4 | R20.2 135.89,73.79 v133.99,73.79
  Top 1.27: v130.81,54.61 130.81,65.53 123.95,65.53 v123.95,73.79
  Bottom 0.406: X4.3 112.27,85.09 R22.1 | v133.99,73.79 120.65,73.79
  Bottom 1.016: L3.4 135.89,44.15
  Bottom 1.27: v130.81,54.61 130.81,37.08 116.84,37.08 C18.+ 116.84,35.56 135.89,35.56 C17.1 135.89,44.15 | v123.95,73.79 120.65,73.79 120.65,82.04 118.11,82.04 X4.3

## Text on the board
Top: SPS 3.0 | 20170227
bPlace: WARNING! | HIGH VOLTAGE PRESENT / RISK OF ELECTRIC SHOCK / TEST BEFORE TOUCHING